# EAGLE board Motor Control Saleh Alkirsh (EAGLE 7.2.0)
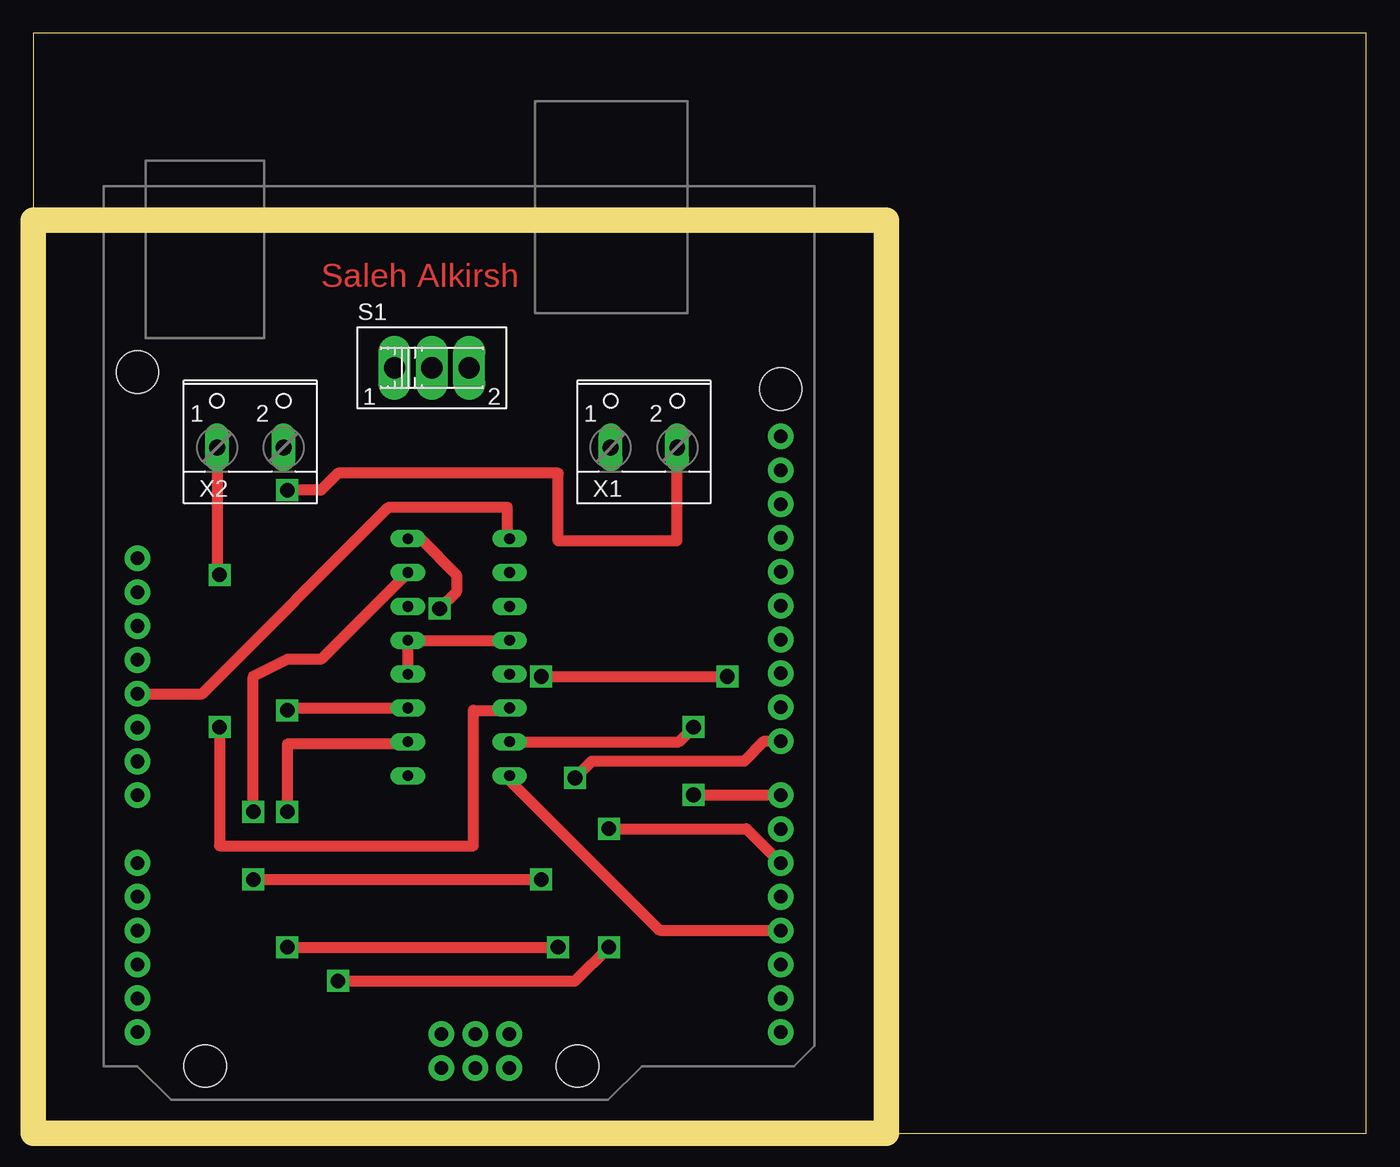
[diagram p0: board, top side]
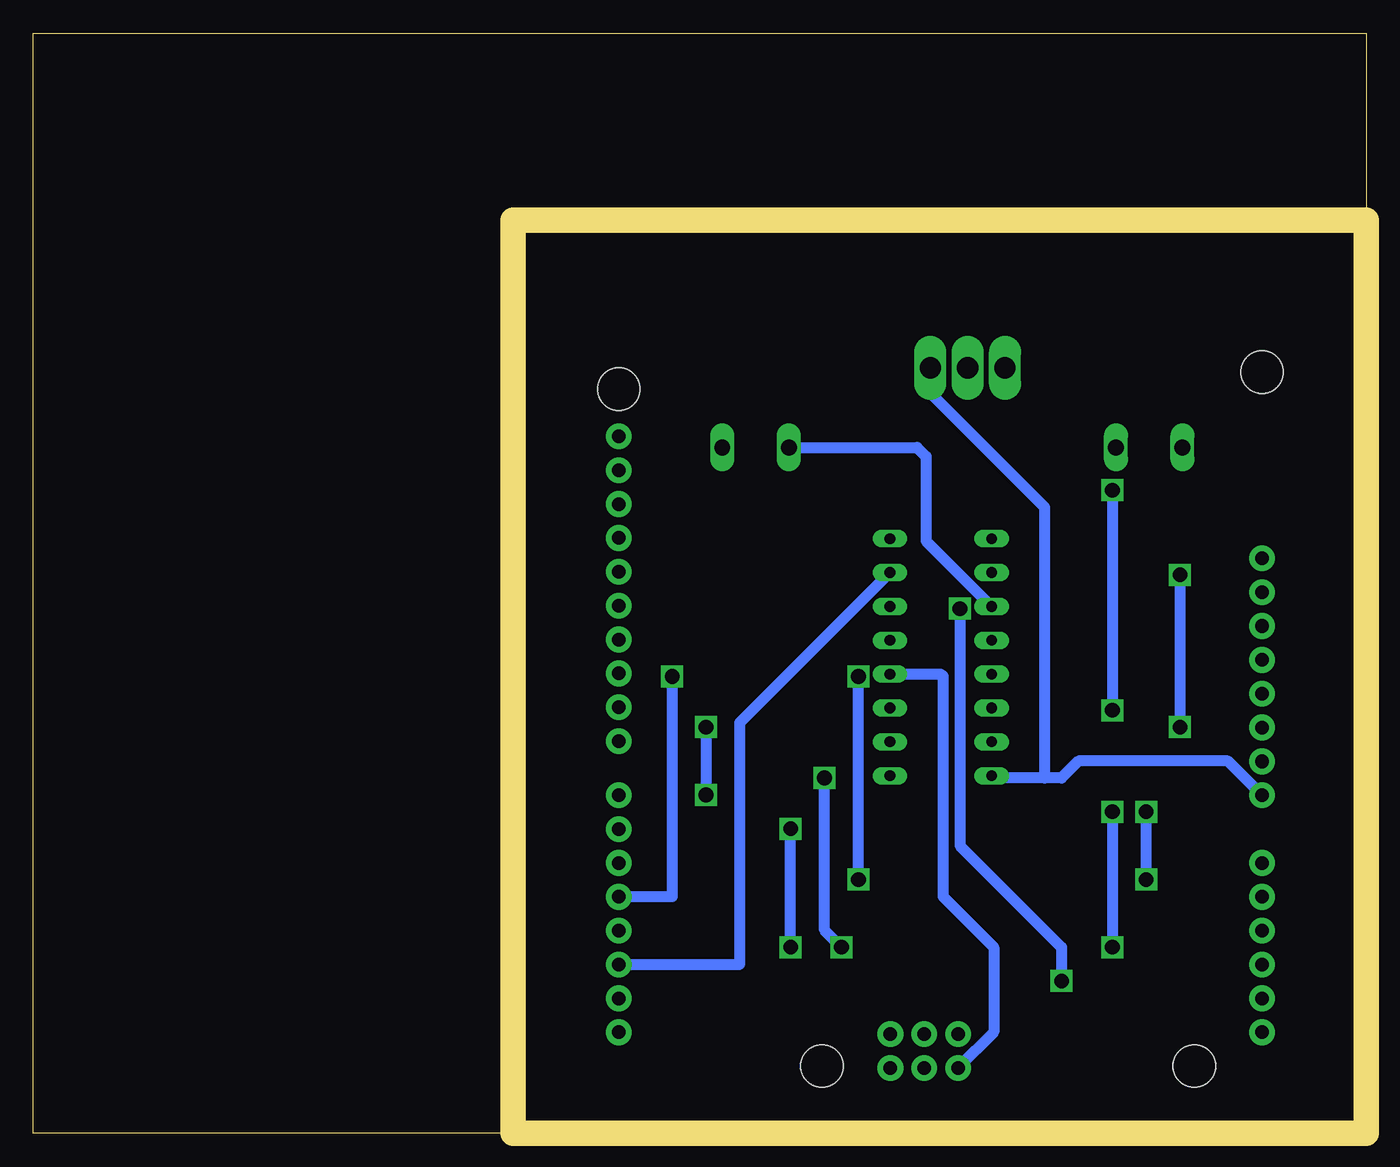
[diagram p1: board, bottom side, seen from below]

Size 100 x 82.54 mm. Coordinates in mm from the lower left corner, seen from the top.
Outline: 64,0 100,0 100,82.54 0,82.54 0,68.54
Outline: 0,68.54 0,0 64,0
Outline: 0,68.54 64,68.54 64,0
Copper layers (1*16): Top 0.035mm / dielectric 1.5mm / Bottom 0.035mm
Design rules "default": minimum track width 10mil, minimum drill 24mil, track to track 8mil, track to pad 8mil, pad to pad 8mil, via to via 8mil, smd to smd 8mil, copper to edge 40mil, drill to drill 8mil, minimum pad ring 10mil, minimum via ring 8mil, stop-mask expansion 4mil, vias tented up to drill 0mil, thermal gap 10mil

## Footprints (pad centres in the part's own frame; a part is rotated, then mirrored left to right if it is on the bottom)
ARDUINO_R3 = drill 1.016 pad 1.93: 3.3V 35.56,2.54; 5V 38.1,2.54; A0 50.8,2.54; A1 53.34,2.54; A2 55.88,2.54; A3 58.42,2.54; A4 60.96,2.54; A5 63.5,2.54; AREF 23.876,50.8; D0 63.5,50.8; D1 60.96,50.8; D2 58.42,50.8; D3 55.88,50.8; D4 53.34,50.8; D5 50.8,50.8; D6 48.26,50.8; D7 45.72,50.8; D8 41.656,50.8; D9 39.116,50.8; D10 36.576,50.8; D11 34.036,50.8; D12 31.496,50.8; D13 28.956,50.8; GND@1 40.64,2.54; GND@2 43.18,2.54; GND@3 26.416,50.8; GND@4 66.18,25.35; IOREF 30.48,2.54; MISO 63.64,30.43; MOSI 66.18,27.89; NC 27.94,2.54; RESET@1 33.02,2.54; RESET@2 63.64,25.35; SCK 63.64,27.89; SCL 18.796,50.8; SDA 21.336,50.8; VCC 66.18,30.43; VIN 45.72,2.54 | hole 3.175: 15.24,50.8; 66.04,35.56; 66.04,7.62; 13.97,2.54
SLIDE_SWITCH = drill 1.6 long: 1 -2.794,0; 2 0,0; 3 2.794,0
DIP16 = drill 0.8 long: P1 -8.89,-3.81; P2 -6.35,-3.81; P3 -3.81,-3.81; P4 -1.27,-3.81; P5 1.27,-3.81; P6 3.81,-3.81; P7 6.35,-3.81; P8 8.89,-3.81; P9 8.89,3.81; P10 6.35,3.81; P11 3.81,3.81; P12 1.27,3.81; P13 -1.27,3.81; P14 -3.81,3.81; P15 -6.35,3.81; P16 -8.89,3.81
2PIN-SCREW-TERMINAL = drill 1.194 long: 1 -2.5,-1.27; 2 2.5,-1.27

## Placement (x,y rotation side)
J1  ARDUINO_UNO_R3  [ARDUINO_R3]  5.27,71.09 270 top
S1  [SLIDE_SWITCH]  29.9,57.44 0 top
U$1  MOTOR_DRIVERDIP16  [DIP16]  31.92,35.73 270 top
X1  [2PIN-SCREW-TERMINAL]  45.81,52.74 0 top
X2  [2PIN-SCREW-TERMINAL]  16.28,52.74 0 top

## Library data of the parts
J1 S1 U$1 = ISCTRainingProgram
X1 X2 = ISCTRainingProgram; MPN: 237-102; OC_FARNELL: unknown; OC_NEWARK: 70K9898

## Nets
GND: U$1.P4 U$1.P5 U$1.P13
N$1: U$1.P3 X1.1
N$2: U$1.P6 X1.2
N$3: X2.2
N$4: U$1.P11 X2.1
N$5: J1.5V U$1.P16
N$6: J1.GND@4 U$1.P12
N$7: J1.VIN S1.3 U$1.P8
N$8: J1.D3 U$1.P9
N$9: J1.D2 U$1.P15
N$10: J1.D4 U$1.P2
N$11: J1.D5 U$1.P1
N$12: J1.D7 U$1.P10
N$13: J1.D8 U$1.P7

## Tracks (layer width: path | path; a pad name or v marks a point on that pad's centre or on a via)
GND
  Top 0.813: U$1.P5 U$1.P4 U$1.P13
N$1
  Bottom 0.813: X1.1 33.69,51.47 33.02,50.8 33.02,44.45 U$1.P3
N$2  (via drill 1.1)
  Top 0.813: v19.05,31.75 19.22,31.92 U$1.P6 | X1.2 48.26,51.42 48.26,44.45 39.37,44.45 39.37,49.53 22.86,49.53 21.59,48.26 v19.05,48.26
  Bottom 0.813: v19.05,48.26 v19.05,31.75
N$4  (via drill 1.1)
  Top 0.813: X2.1 13.78,42.1 v13.97,41.91 | v13.97,30.48 13.97,21.59 33.02,21.59 33.02,31.75 35.56,31.75 U$1.P11
  Bottom 0.813: v13.97,41.91 v13.97,30.48
N$5
  Top 0.813: J1.5V 12.67,32.99 26.67,46.99 35.56,46.99 35.56,44.79 U$1.P16
N$6
  Bottom 0.813: U$1.P12 31.92,34.46 31.75,34.29 31.75,17.78 27.94,13.97 27.94,7.59 J1.GND@4
N$7
  Bottom 0.813: 24.13,26.67 22.86,26.67 21.59,27.94 10.38,27.94 J1.VIN | 24.13,26.67 27.94,26.67 U$1.P8 | S1.3 32.69,55.55 24.13,46.99 24.13,26.67
N$8
  Top 0.813: U$1.P9 35.73,26.5 46.99,15.24 56.04,15.24 J1.D3
N$9
  Bottom 0.813: J1.D2 47.02,12.67 46.99,12.7 46.99,30.82 U$1.P15
N$10  (via drill 1.1)
  Top 0.813: U$1.P2 21.59,35.56 19.05,35.56 16.51,34.29 v16.51,24.13 | v16.51,19.05 v38.1,19.05 | v38.1,34.29 v52.07,34.29
  Bottom 0.813: v38.1,19.05 v38.1,34.29 | v52.07,34.29 52.07,17.78 52.1,17.75 J1.D4 | v16.51,19.05 v16.51,24.13
N$11  (via drill 1.1)
  Top 0.813: U$1.P1 29.04,44.62 31.75,41.91 31.75,40.64 v30.48,39.37 | v22.86,11.43 40.64,11.43 v43.18,13.97 | v43.18,22.86 53.5,22.86 J1.D5
  Bottom 0.813: v30.48,39.37 30.48,21.59 22.86,13.97 v22.86,11.43 | v43.18,13.97 v43.18,22.86
N$12  (via drill 1.1)
  Top 0.813: U$1.P10 48.43,29.38 v49.53,30.48 | v49.53,25.4 56.04,25.4 J1.D7
  Bottom 0.813: v49.53,30.48 v49.53,25.4
N$13  (via drill 1.1)
  Top 0.813: U$1.P7 27.94,29.21 19.05,29.21 v19.05,24.13 | v19.05,13.97 v39.37,13.97 | v40.64,26.67 41.91,27.94 53.34,27.94 54.83,29.43 J1.D8
  Bottom 0.813: v19.05,24.13 v19.05,13.97 | v39.37,13.97 40.64,15.24 v40.64,26.67

## Text on the board
Top: Saleh Alkirsh